# Altium PCB LoraPIC2.PcbDoc
Units mm, origin at the board's own origin, x right, y up, seen from the top; angles counter-clockwise.
Board outline 78 x 29.8 mm, 2 copper layers (Top Layer, Bottom Layer); 18 components, 27 nets, 119 pads, 106 vias.
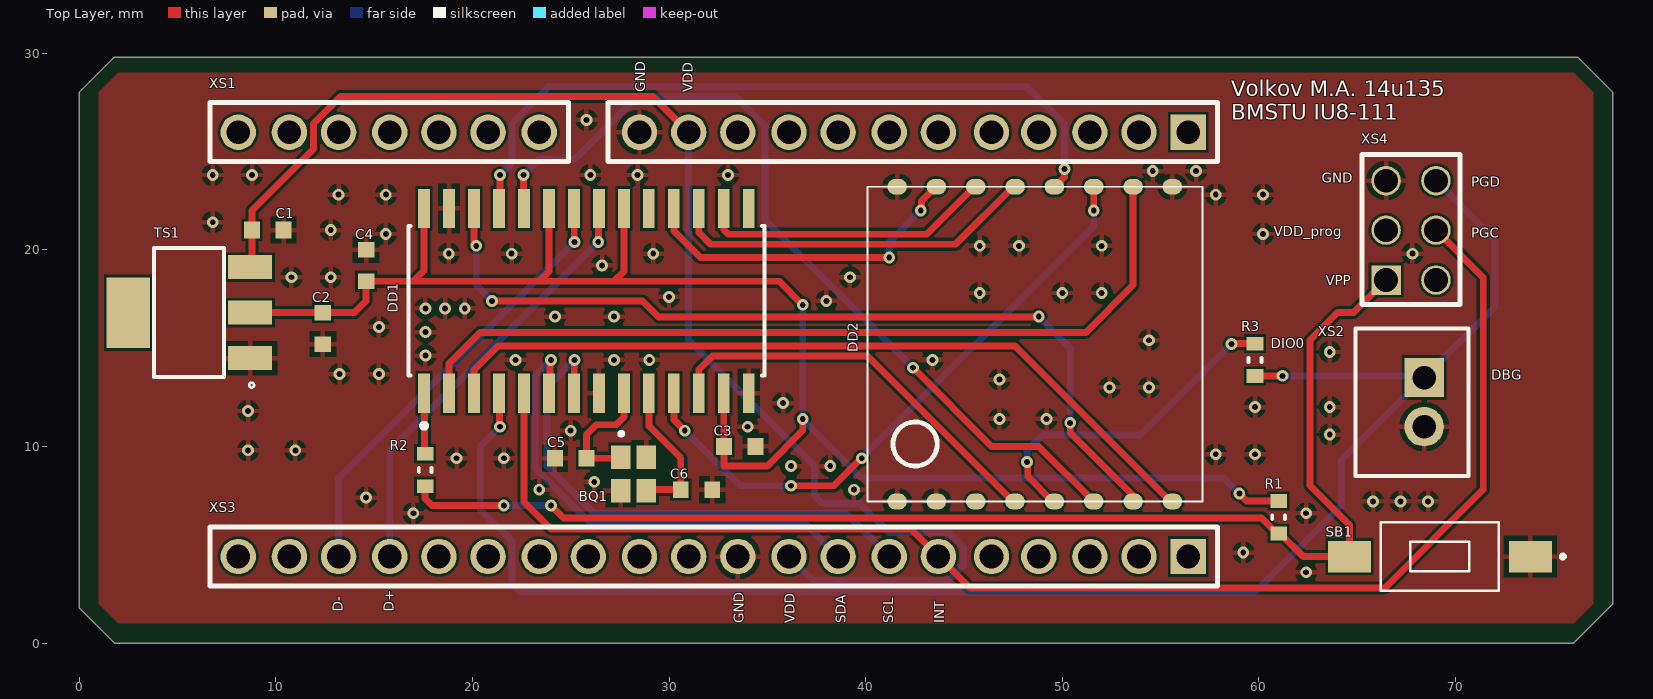
[diagram p0: Top Layer view]
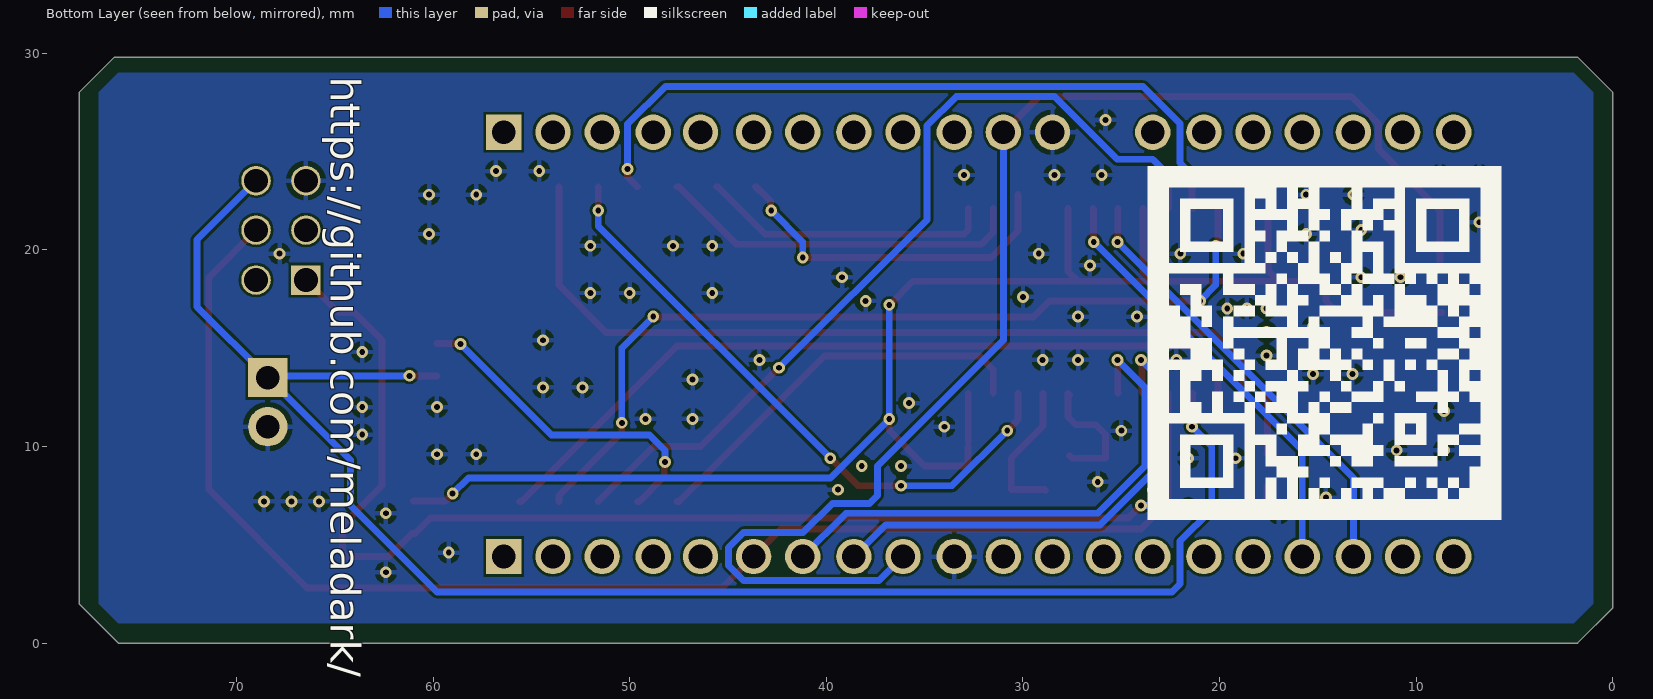
[diagram p1: Bottom Layer view, seen from below]

## Layer stack, top to bottom
Top Solder: solder mask 0.0102, Solder Resist, Dk 3.5
Top Layer: signal copper 0.0356
Dielectric 1: dielectric 0.32, FR-4, Dk 4.8
Bottom Layer: signal copper 0.0356
Bottom Solder: solder mask 0.0102, Solder Resist, Dk 3.5

## Board outline
0,1.8 0,28 1.8,29.8 76.2,29.8 78,28 78,2 76,0 1.8,0

## Design rules (kind name [scope] priority, off if disabled: settings)
Clearance [All] p1: gap=0.125 ignorepadtopadclearanceinfootprint=FALSE
PolygonConnect [All] p1: connectstyle=Relief reliefconductorwidth=0.254 reliefentries=4 polygonreliefangle="90 Angle" airgapwidth=0.254
RoutingVias [All] p1: holewidth=0.3 width=0.6 viastyle="Through Hole" minholewidth=0.3 minwidth=0.6 maxholewidth=0.6 maxwidth=0.8
SolderMaskExpansion [All] p1: expansion=0.102
Width [All] p1: maxlimit=0.6 minlimit=0.125 preferedwidth=0.2
30 further rules are at their usual default settings.

## Components (designator, comment, footprint, x,y, rotation, side; value= is the part's Value field where it differs from the comment)
BQ1 "NX2520SA" *XTAL_NX2520SA-24.000000MHZ-B8 28.2,8.6 r270 top
C1 "*" CAPC1608X09L 9.6,21 r0 top
C2 "*" CAPC1608X09L 12.4,16 r90 top
C3 "*" CAPC1608X09L 33.6,10 r0 top
C4 "*" CAPC1608X09L 14.6,19.2 r90 top
C5 "GRM1885C1H510JA01D" CAPC1608X09L 25,9.4 r180 top
C6 "GRM1885C2A150JA01D" CAPC1608X09L 31.4,7.8 r0 top
DD1 "PIC24FJ128GB202-I-SO" Microchip_SO-28_0 25.8,17.4 r90 top
DD2 "RA-02 SX1278" RA-02 40.1,7.2 r90 top
R1 "RC0603FR-0710KL" RESC1608X05N 61,6.4 r270 top value=10кОм
R2 "100 ом до 470" RESC1608X05N 17.6,8.8 r270 top value="100 Ом"
R3 "100 ом до 470" RESC1608X05N 59.8,14.4 r270 top value="0 Ом"
SB1 "1437566-3 (FSMSM)" *SW_1437566-4 69.2,4.4 r180 top
TS1 "LD1117S33CTR" *SOT223 5.6,16.8 r180 top
XS1 "PBS-20" "PBS-20 - 13" 56.4,25.974 r180 top
XS2 "DS1066-02M(MW-2M)" B2B-XH-A 68.4,12.25 r90 top
XS3 "PBS-20" PBS-20 56.4,4.4 r180 top
XS4 "DS1021-2x3S" DS1021-2x3S 65.23,17.21 r0 top

## Footprints (in the part's own frame and the unit in brackets; to place one, negate y for a bottom-side part, rotate by r counter-clockwise, add the part's x,y. Pads: shape width x height; smd on the part's side, far side on the other; paste and mask are expansions set on the pad)
*SOT223 [mil]
  rect 88x48 smd: 1(-122,91) 2(-122,0) 3(-122,-91)
  rect 86.61x141.73 smd: 4(122.01,0)
  silkscreen extent -130,-129 70,150, body extent -138,-128 138,128, height 67
*SW_1437566-4 [mm]
  rect 2.18x1.6 smd: 1(-4.6,0) 2(4.6,0)
  silkscreen extent -6.35,-1.75 3,1.75, body extent -4.98,-1.75 4.98,1.75, height 4.4
*XTAL_NX2520SA-24.000000MHZ-B8 [mm]
  rect 1.2x1 smd: 1(-0.85,-0.65) 2(0.85,-0.65) 3(0.85,0.65) 4(-0.85,0.65)
  silkscreen extent -2.09,-0.68 -1.99,-0.58, body extent -1.25,-1 1.25,1, height 0.65
B2B-XH-A [mm] "2 pin connector"
  rect 2x2 hole 1.2 mask+0.07: 1(1.25,0)
  round 2 hole 1.2 mask+0.07: 2(-1.25,0)
  silkscreen extent -3.75,-2.25 3.75,3.5, body extent -3.7,-2.35 3.7,3.39, height 7.11
CAPC1608X09L [mm] "Chip Capacitor, 2-Leads, Body 1.60x0.80mm, IPC High Density"
  rect 0.8x0.85 smd paste-0.05 mask+0.07: 1(-0.8,0) 2(0.8,0)
  body extent -0.8,-0.4 0.8,0.4, height 0.9
DS1021-2x3S [mm]
  rect 1.5x1.5 hole 1.2: 1(1.23,1.25)
  round 1.5 hole 1.2: 2(1.23,3.79) 3(1.23,6.3) 4(3.77,6.3) 5(3.77,3.79) 6(3.77,1.25)
  silkscreen extent 0,0 5,7.62, body extent 0,0 5,7.62, height 8.4
Microchip_SO-28_0 [mm]
  rect 2x0.6 smd paste+0 mask+0: 1(-4.7,8.255) 2(-4.7,6.985) 3(-4.7,5.715) 4(-4.7,4.445) 5(-4.7,3.175) 6(-4.7,1.905) 7(-4.7,0.635) 8(-4.7,-0.635) 9(-4.7,-1.905) 10(-4.7,-3.175) 11(-4.7,-4.445) 12(-4.7,-5.715) 13(-4.7,-6.985) 14(-4.7,-8.255) 15(4.7,-8.255) 16(4.7,-6.985) 17(4.7,-5.715) 18(4.7,-4.445) 19(4.7,-3.175) 20(4.7,-1.905) 21(4.7,-0.635) 22(4.7,0.635) 23(4.7,1.905) 24(4.7,3.175) 25(4.7,4.445) 26(4.7,5.715) 27(4.7,6.985) 28(4.7,8.255)
  silkscreen extent -6.47,-9.05 3.8,9.05, body extent -5.8,-9.3 5.8,9.3, height 0.25
PBS-20 [mm]
  rect 1.8x1.8 hole 1.2: 1(0,0)
  round 1.8 hole 1.2: 2(2.5,0) 3(5,0) 4(7.6,0) 5(10,0) 6(12.7,0) 7(15.2,0) 8(17.8,0) 9(20.3,0) 10(22.9,0) 11(25.4,0) 12(27.9,0) 13(30.5,0) 14(33,0) 15(35.6,0) 16(38.1,0) 17(40.6,0) 18(43.2,0) 19(45.7,0) 20(48.3,0)
  silkscreen extent -1.5,-1.5 49.75,1.5, body extent -1.27,-1.27 49.53,1.27, height 8.4
"PBS-20 - 13" [mm]
  rect 1.8x1.8 hole 1.2: 1(0,0)
  round 1.8 hole 1.2: 2(2.5,0) 3(5,0) 4(7.6,0) 5(10,0) 6(12.7,0) 7(15.2,0) 8(17.8,0) 9(20.3,0) 10(22.9,0) 11(25.4,0) 12(27.9,0) 14(33,0) 15(35.6,0) 16(38.1,0) 17(40.6,0) 18(43.2,0) 19(45.7,0) 20(48.3,0)
  silkscreen extent -1.5,-1.5 49.75,1.5, body extent -1.27,-1.27 49.53,1.27, height 8.4
RA-02 [mm]
  oval 0.8x1 smd: 1(0,-1.5) 2(0,-3.5) 3(0,-5.5) 4(0,-7.493) 5(0,-9.5) 6(0,-11.5) 7(0,-13.5) 8(0,-15.5) 9(16,-15.5) 10(16,-13.5) 11(16,-11.5) 12(16,-9.5) 13(16,-7.5) 14(16,-5.5) 15(16,-3.5) 16(16,-1.5)
  silkscreen extent 0,-17.02 16,0, body extent 0,-17.01 16,-0.01, height 3.2
RESC1608X05N [mm] "Chip Resistor, 2-Leads, Body 1.60x0.80mm, IPC Medium Density"
  rect 0.7x0.85 smd paste-0.05: 1(-0.825,0) 2(0.825,0)
  silkscreen extent -0.1,-0.33 0.1,0.33, body extent -0.8,-0.4 0.8,0.4, height 0.45

## Part data
BQ1: library part NX2520SA-24.000000MHZ-B8, "CRYSTAL 24.0000MHZ 10PF SMD", Package="SMD-4 NDK America, Inc.", Availability=Unavailable, MF="NDK America, Inc.", MP=NX2520SA-24.000000MHZ-B8, Price=None, SnapEDA_Link=https://www.snapeda.com/parts/NX2520SA-24.000000MHZ-B8/NDK%20America%2C%20Inc./view-part/?ref=snap
C1 C2 C3 C4 C5: library part CC1608, "Конденсатор 1.6x0.8 мм", Tolerance=±10%, РКД Наименование="CC1608M - NP0 - 16 V - 10 nF ±10%", ТКЕ=X7R
  C1: GRM21BR71C105KA01L=100n
  C2: GRM21BR71C105KA01L=10u
  C3 C4: GRM21BR71C105KA01L=0.1u
  C5: ComponentLink1Description=buy, ComponentLink1URL=https://www.chipdip.ru/product/grm1885c1h510j, GRM21BR71C105KA01L=50p
C6: library part CC1608, "Конденсатор 0.8x0.5 мм 50 пикофара", Tolerance=±10%, ComponentLink1Description=buy, ComponentLink1URL=https://www.chipdip.ru/product/grm1885c2a150j, GRM21BR71C105KA01L=15p, РКД Наименование="CC1608M - NP0 - 16 V - 10 nF ±10%", ТКЕ=X7R
DD2: library part RA-02
R1 R2 R3: library part R1608, "Резистор 1.6x0.8 мм", Tolerance=±5%, РКД Наименование="RC1608M - 100 Ohm ±5%"
  R1: ComponentLink1Description=https://www.chipdip.ru/product0/9000079736, ComponentLink1URL=https://www.chipdip.ru/product0/9000079736
  R2 R3: ComponentLink1Description=https://www.chipdip.ru/product0/9000079616, ComponentLink1URL=https://www.chipdip.ru/product0/9000079616
SB1: library part FSMSM, "1437566-3 (FSMSM), Кнопка тактовая h=4.6 мм SMD SPST Switch Tactile / Switch Tactile OFF (ON) SPST Rectangular Button Gull Wing 0.05A 24VDC SMD Loose", ComponentLink1Description=buy, ComponentLink1URL=https://www.chipdip.ru/product/tyco-1437566-3-fsmsm, ComponentLink2Description=datasheet, ComponentLink2URL=https://static.chipdip.ru/lib/071/DOC000071159.pdf, Артикул="1437566-3 (FSMSM)", Произвдитель="TE Connectivity"
TS1: "Linear Regulator / LDO Regulator Pos 3.3V 1.3A 4-Pin(3+Tab) SOT-223 T/R", Code_IPC=SOT-223, ComponentLink1Description=buy, ComponentLink1URL=https://www.chipdip.ru/product/ld1117s33ctr-2, ComponentLink2Description=datasheet, ComponentLink2URL=https://static.chipdip.ru/lib/292/DOC000292513.pdf, DatasheetVersion="revB, Feb-2007", PackageDescription="3-Lead Plastic Small Outline Transistor (TT) [SOT-23]", PackageReference=SOT-223, PackageVersion="revBB, Aug-2009", PartNumber=LD1117S33CTR
XS1: library part PBS-20_1, ComponentLink1Description=datasheet, ComponentLink1URL=https://static.chipdip.ru/lib/226/DOC000226931.pdf, ComponentLink2Description=buy, ComponentLink2URL=https://www.chipdip.ru/catalog-show/pin-connectors-and-sockets?x.698=ZGQ&gq=PBS
XS2: library part B2B-XH-A, "Разъем 2", Colour=Natural, Contact Resistance=20mR, Current Rating=3A, Housing Colour=White, Insulation Resistance=1GR, Manufacturer=JST, Manufacturer Part Number=B2B-XH-A(LF)(SN), Max Operating Temperature=85°C, Max Voltage Rating (AC)=250V, Min Operating Temperature=-25°C, Supplier Part Number 1=455-2247-ND, Connector Type="Male Pin", Contact Material=Brass, Contact Plating=Copper,Lead,Tin, Depth=5.75mm, Fastening Type=Detent, Housing Material=Polyamide, Lead Free="Lead Free", Lead Pitch=2.5mm, Length=7.4mm, Max Current Rating=3A, Max Voltage Rating (DC)=250V, Mount="Through Hole", Number of Contacts=2, Number of Positions=2, Number of Rows=1, Orientation=Straight, Packaging=Bulk, Pitch=2.5mm, Pricing 1="1=0.15, 10=0.141, 100=0.0868, 500=0.07182, 1000=0.06284, 5000=0.05387, 10000=0.05237 (USD)", REACH SVHC="No SVHC", Stock 1=494280, Supplier 1=Digi-Key, Termination=Solder, Voltage Rating=250V, Voltage Rating (AC)=250V, Wire/Cable Gauge=22AWG
XS3: library part PBS_20_2
XS4: library part PLD3X2, ComponentLink1Description=Datasheet, ComponentLink1URL=https://static.chipdip.ru/lib/227/DOC000227157.pdf, ComponentLink2Description=footprint, ComponentLink2URL=https://www.3dcontentcentral.com/secure/download-model.aspx?catalogid=171&id=227431

## Via types
v1: diameter 0.6, hole 0.3, Top Layer to Bottom Layer, 106 vias

## Nets (pads, with @x,y where several pads share a name; then routed paths per layer and width w, separated by ;. In a path a pad name is that pad's centre, name@x,y a point inside that pad or via, vN(x,y) a via of type N, cw(c..) or ccw(c..) an arc to the next point about the centre after c; other vN are vias at no path point)
D+: DD1.21 XS3.17 | length 22.1
  Top Layer w0.35: v1(26.4,20.4) 26.418,20.418 26.418,22.082 DD1.21
  Bottom Layer w0.35: XS3.17 15.8,9.8 v1(26.4,20.4)
D-: DD1.22 XS3.18 | length 22.7
  Top Layer w0.35: DD1.22 25.182,22.083 25.182,20.418 v1(25.2,20.4)
  Bottom Layer w0.35: XS3.18 13.2,8.4 v1(25.2,20.4)
DBG: DD1.4 R3.2 XS2.1 XS4.4 | length 84.6
  Top Layer w0.35: DD1.4 21.378,12.677 21.378,11.022 v1(21.4,11) ; R3.2 61.175,13.575 v1(61.188,13.587) v1@61.2,13.6
  Bottom Layer w0.35: v1(21.4,11) 20.4,10 20.4,6.8 22.016,5.184 22.016,3.016 22.431,2.6 59.8,2.6 64.2,7 64.2,9.3 XS2.1 ; v1(61.188,13.587) 68.312,13.587 XS2.1 ; XS4.4 72,20.51 72,17.1 XS2.1
DIO3: DD1.3 DD2.8 | length 40.5
  Top Layer w0.35: DD1.3 20.085,13.885 21.306,15.106 47.594,15.106 55.5,7.2 DD2.8
DIO4: DD1.2 DD2.10 | length 43
  Top Layer w0.35: DD1.2 18.815,14.215 20.4,15.8 51.2,15.8 53.6,18.2 DD2.10
DIO5: DD1.11 DD2.11 | length 31.6
  Top Layer w0.35: DD1.11 30.245,11.355 v1(30.8,10.8) ; v1(36.2,8) 38.4,8 v1(39.8,9.4) ; v1(51.6,22) DD2.11
  Bottom Layer w0.35: v1(30.8,10.8) 33.6,8 v1(36.2,8) ; v1(39.8,9.4) 51.6,21.2 v1(51.6,22)
GND: BQ1.2 BQ1.4 C1.2 C2.1 C3.2 C4.2 C5.2 C6.2 DD1.8 DD1.14 DD1.27 DD2.1 DD2.2 DD2.9 DD2.16 SB1.1 TS1.1 XS1.12 XS2.2 XS3.10 XS4.3
  other v1: 62.4,3.6 59.2,4.6 17,6.6 62.4,6.6 65.8,7.2 67.2,7.2 68.6,7.2 14.6,7.4 23.4,7.8 39.4,7.8 26.2,8.2 36.2,9 38.2,9 19.2,9.4 21.6,9.4 57.8,9.6 59.8,9.6 8.6,9.8 11,9.8 63.6,10.6 25,10.8 34,11 46.8,11.4 49.2,11.4 8.6,11.8 59.8,12 63.6,12 35.8,12.2 52.4,13 54.4,13 46.8,13.4 13.25,13.675 15.25,13.675 22.2,14.4 27.2,14.4 29,14.4 43.4,14.4 17.615,14.615 63.6,14.8 54.4,15.4 17.615,15.815 15.25,16.075 24.2,16.6 27.2,16.6 17.615,17.015 18.615,17.015 19.615,17.015 38,17.4 30,17.6 45.8,17.8 50,17.8 52,17.8 10.8,18.6 12.8,18.6 39.2,18.6 26.6,19.2 18.8,19.8 22,19.8 29.2,19.8 67.8,19.8 45.8,20.2 47.8,20.2 52,20.2 15.6,20.8 60.2,20.8 12.8,21 6.8,21.4 13.2,22.8 15.6,22.8 57.8,22.8 60.2,22.8 6.8,23.8 8.8,23.8 26,23.8 28.4,23.8 33,23.8 54.6,24 56.8,24 25.8,26.6
INT: DD1.5 XS3.6 XS4.5 | length 72.7
  Top Layer w0.35: DD1.5@22.612,12.712 DD1.5 22.625,7.175 24,5.8 42.3,5.8 XS3.6 45.3,2.8 66.4,2.8 71.4,7.8 71.4,18.6 XS4.5
  Bottom Layer w0.35: XS3.6 XS3.6@43.7,4.7
MCLR: DD1.1 R2.1 | length 3.1
  Top Layer w0.35: DD1.1 17.573,12.672 17.573,9.652 R2.1
NetBQ1_1: BQ1.1 C5.1 DD1.9 | length 6.7
  Top Layer w0.35: BQ1.1@27.628,9.527 BQ1.1 27.5,9.4 C5.1 25.8,10.6 26.3,11.1 27.3,11.1 27.705,11.505 DD1.9 DD1.9@27.628,12.622
NetBQ1_3: BQ1.3 C6.1 DD1.10 | length 7.3
  Top Layer w0.35: BQ1.3 28.9,7.8 C6.1 30.6,9.4 28.975,11.025 DD1.10
NetDD1_16: DD1.16 DD2.14 | length 15
  Top Layer w0.35: DD1.16 32.785,21.015 33.016,20.784 43.084,20.784 45.5,23.2 DD2.14
NetDD1_17: DD1.17 DD2.13 | length 18.8
  Top Layer w0.35: DD1.17 31.515,20.885 32.122,20.278 44.578,20.278 47.5,23.2 DD2.13
NetDD1_18: DD1.18 DD2.15 | length 18.2
  Top Layer w0.35: DD1.18@30.245,22.8 DD1.18 30.245,20.955 31.6,19.6 v1(41.2,19.6) ; v1(42.8,22) 42.842,22.042 42.842,22.484 43.558,23.2 DD2.15 DD2.15@43.42,23.02
  Bottom Layer w0.35: v1(41.2,19.6) 41.2,20.4 v1(42.8,22)
NetDD1_24: DD1.24 DD2.6 | length 43.5
  Top Layer w0.35: v1@22.6,23.6 22.6,22.125 DD1.24 ; v1(42.4,14) 46.4,10 48.8,10 DD2.6
  Bottom Layer w0.35: v1(22.6,23.8) 23.4,24.6 25.2,24.6 28.4,27.8 33.393,27.8 34.884,26.308 34.884,21.516 v1(42.4,14)
NetDD1_25: DD1.25 DD2.12 | length 37.5
  Top Layer w0.35: DD1.25 21.4,22.145 v1@21.4,23.6 ; DD2.12 50.108,23.708 v1(50.108,24.108)
  Bottom Layer w0.35: v1(21.4,23.8) 22.021,24.421 22.021,26.421 23.906,28.306 48.187,28.306 50.108,26.385 v1(50.108,24.108)
NetDD1_26: DD1.26 DD2.7 | length 44.6
  Top Layer w0.35: DD1.26 20.085,20.315 v1(20.2,20.2) ; v1(21,17.4) 28.649,17.4 29.465,16.584 48.784,16.584 v1(48.8,16.6) ; v1(50.4,11.2) 50.4,10.7 53.6,7.5 DD2.7
  Bottom Layer w0.35: v1(20.2,20.2) 20.2,18.2 v1(21,17.4) ; v1(48.8,16.6) 50.4,15 v1(50.4,11.2)
NetDD2_5: DD2.5 R3.1 | length 17.1
  Top Layer w0.35: v1(48.2,9.2) 48.242,9.158 48.242,8.458 49.5,7.2 DD2.5 ; v1(58.6,15.2) 58.625,15.225 R3.1
  Bottom Layer w0.35: v1(48.2,9.2) 48.2,9.8 48.984,10.584 53.984,10.584 v1(58.6,15.2)
RESET_LoRa: DD1.12 DD2.4 | length 20.6
  Top Layer w0.35: DD1.12 31.515,13.915 32.2,14.6 40.093,14.6 47.493,7.2 DD2.4
SCL: DD1.7 XS3.7 | length 27
  Top Layer w0.35: DD1.7 25.182,12.717 25.182,14.382 v1(25.2,14.4)
  Bottom Layer w0.35: v1(25.2,14.4) 23.8,13 23.8,9 26.2,6.6 39,6.6 XS3.7
SDA: DD1.6 XS3.8 | length 24.8
  Top Layer w0.35: DD1.6 23.958,12.763 23.958,14.358 v1(24,14.4)
  Bottom Layer w0.35: v1(24,14.4) 23.2,13.6 23.2,8.884 26.084,6 37,6 XS3.8
V3.3: DD2.3
VBUS: DD1.15
VDD: C2.2 C3.1 C4.1 DD1.13 DD1.20 DD1.23 DD1.28 R1.1 TS1.2 | length 82.3
  Top Layer w0.35: TS1.2 C2.2 14,16.8 14.6,17.4 C4.1 17,18.4 ; DD1.28@17.445,22.2 DD1.28 17.545,18.945 17,18.4 ; DD1.23 23.895,18.895 23.4,18.4 ; DD1.20 27.705,18.905 27.2,18.4 ; C3.1@32.785,10.215 DD1.13 ; C3.1 32.8,9 35,9 36.8,10.8 v1(36.8,11.4) ; v1(36.8,17.2) 35.6,18.4 27.2,18.4 ; v1(59,7.6) 59.375,7.225 R1.1 ; 17,18.4 23.4,18.4 ; 23.4,18.4 27.2,18.4
  Bottom Layer w0.35: v1(36.8,17.2) v1(36.8,11.4) 39.8,8.4 58.2,8.4 v1(59,7.6)
VDD_Plate: C1.1 TS1.3 XS1.11 XS3.9 | length 69.4
  Top Layer w0.35: TS1.3 8.8,19.213 C1.1 8.8,22 11.916,25.115 11.916,26.408 13.307,27.8 29.174,27.8 XS1.11
  Bottom Layer w0.35: XS1.11 31,15.4 37.4,9 37.4,7.506 37.8,7.106 39.694,7.106 41.184,5.616 44.203,5.616 44.97,4.849 44.97,3.951 44.203,3.184 37.316,3.184 XS3.9
VDD_prog: XS4.2
VPP: R1.2 R2.2 SB1.2 XS4.1 | length 65.8
  Top Layer w0.35: R2.2 17.6,7.35 17.95,7 v1(21.6,7) ; v1(24,7) 24.633,6.367 60.133,6.367 60.925,5.575 R1.2 61.075,5.575 62.25,4.4 SB1.2 64.6,6 62.6,8 62.6,15.4 64,16.8 64.8,16.8 XS4.1
  Bottom Layer w0.35: v1(21.6,7) v1(24,7)
pads on no net: DD1.19 TS1.4 XS1.1 XS1.2 XS1.3 XS1.4 XS1.5 XS1.6 XS1.7 XS1.8 XS1.9 XS1.10 XS1.14 XS1.15 XS1.16 XS1.17 XS1.18 XS1.19 XS1.20 XS3.1 XS3.2 XS3.3 XS3.4 XS3.5 XS3.11 XS3.12 XS3.13 XS3.14 XS3.15 XS3.16 XS3.19 XS3.20 XS4.6

## Polygon pours and split planes (outlines as drawn)
GND on Top Layer "Top Layer-GND" (solid, pour order 36): 76,1 77,2 77,28 76,29 2,29 1,28 1,2 2,1
no net on Top Layer "Top Layer-No Net" (solid, pour order 26): 6,1
no net on Top Layer "Top Layer-No Net 1" (solid, pour order 10): 2,1
GND on Bottom Layer "Bottom Layer-GND" (solid, pour order 38): 2,1 1,2 1,28 2,29 76,29 77,28 77,2 76,1
GND on Bottom Layer "Bottom Layer-GND 1" (solid, pour order 20): 8,2

## Silkscreen, mask and mechanical layers (free items; w line width, h text height)
Top Overlay:
  text "GND" at 28.8,28 h0.5 r90
  text "VDD" at 31.2,28 h0.5 r90
  text "Volkov M.A. 14u135 / BMSTU IU8-111" at 58.6,26.6 h0.8
  text "GND" at 63.2,23.4 h0.5
  text "PGD" at 70.8,23.2 h0.5
  text "VDD_prog" at 60.74,20.673 h0.5
  text "PGC" at 70.8,20.6 h0.5
  text "VPP" at 63.4,18.2 h0.5
  text "DIO0" at 60.6,15 h0.5
  text "DBG" at 71.8,13.4 h0.5
  text "D-" at 13.4,1.6 h0.5 r90
  text "D+" at 16,1.6 h0.5 r90
  text "GND" at 33.8,1 h0.5 r90
  text "VDD" at 36.4,1 h0.5 r90
  text "SDA" at 39,1 h0.5 r90
  text "SCL" at 41.4,1 h0.5 r90
  text "INT" at 44,1 h0.5 r90
Bottom Overlay:
  drawing of 255 lines, arcs and shapes, not listed
  text "https://github.com/meladark/SecLoRaATM" at 65.2,28.8 h1.52 r90
Mechanical 13:
  the board outline again, w0.254